# Altium PCB somiqboard.PcbDoc (part 3 of 10)
Units mm, origin at the board's own origin, x right, y up, seen from the top; angles counter-clockwise.
Board outline 110 x 96 mm, 4 copper layers (Top Layer, Ground_Plane, Power_Plane, Bottom Layer), stack 1.454 mm thick; 221 components, 356 nets, 1185 pads, 539 vias.
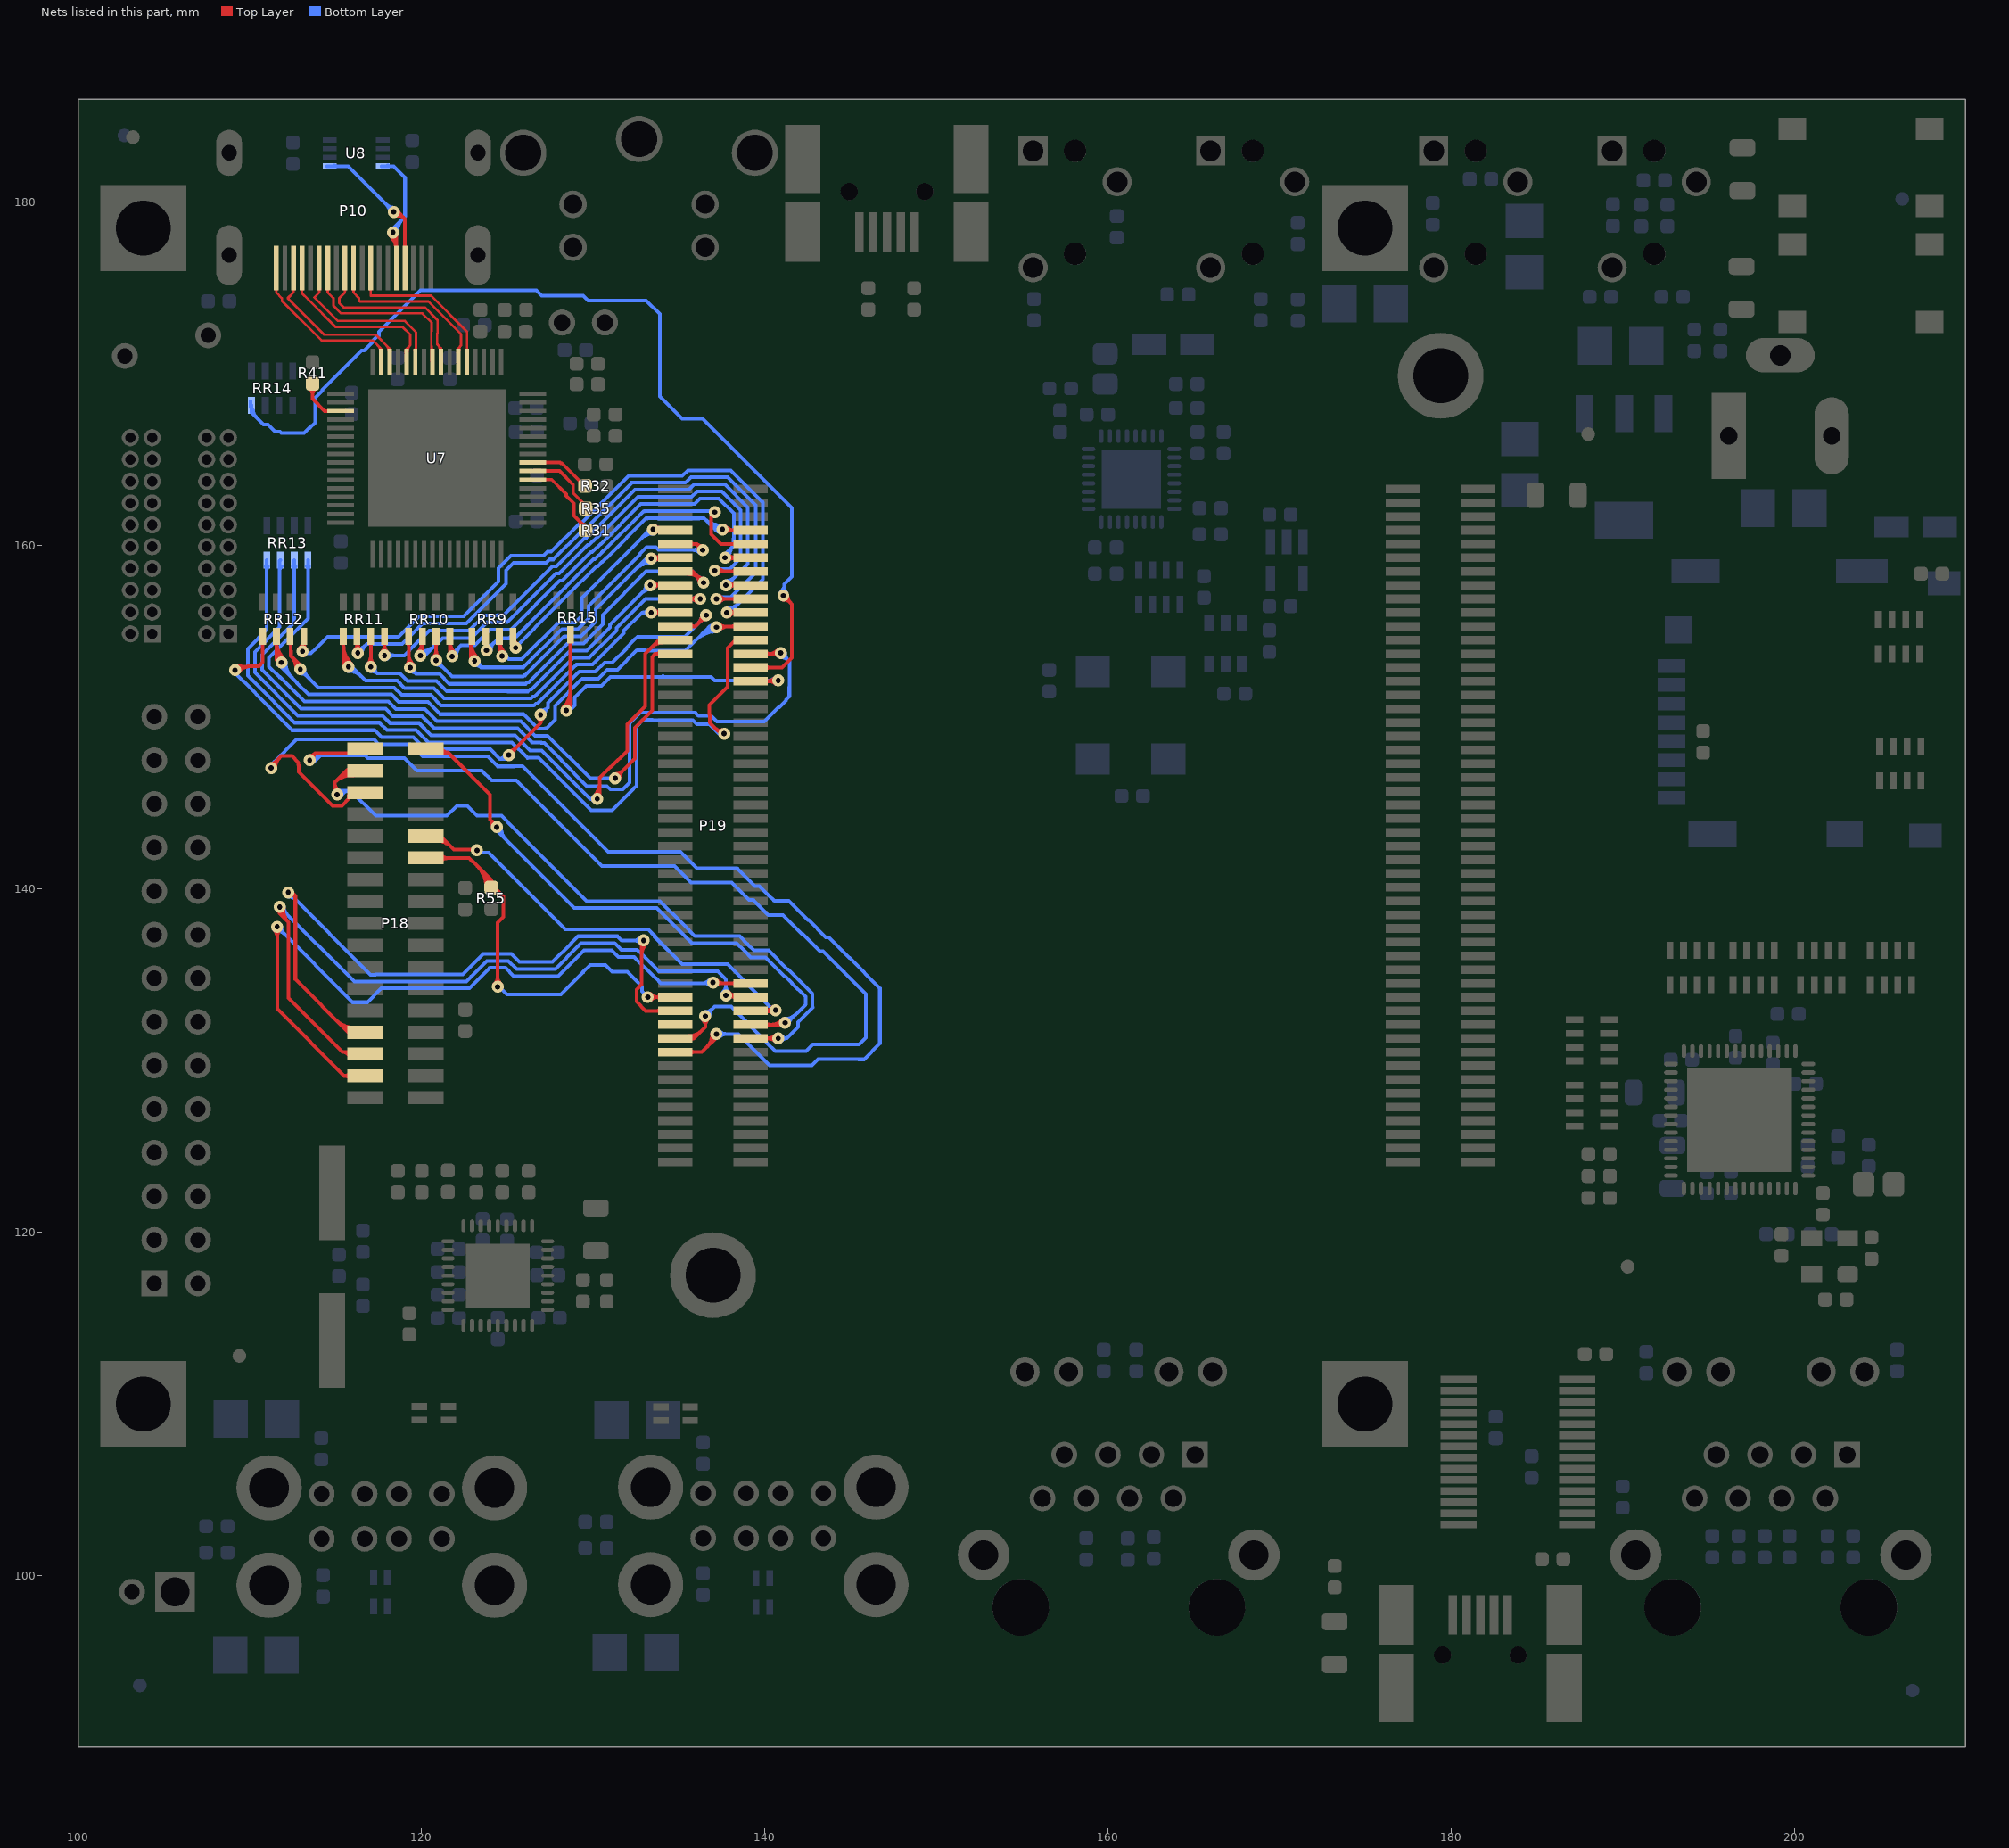
[diagram p5: the nets of this part, all layers, seen from the top]

## Via types
v1: diameter 0.7/0.7/0.7/0.7 (per signal layer), hole 0.3, Top Layer to Bottom Layer, tented both sides, 270 vias
v2: diameter 0.8, hole 0.3, Top Layer to Bottom Layer, tented both sides, 49 vias
v3: diameter 0.6/0.7/0.7/0.6 (per signal layer), hole 0.3, Top Layer to Bottom Layer, tented both sides, 47 vias
v4: diameter 0.6, hole 0.3, Top Layer to Bottom Layer, tented both sides, 43 vias
v5: diameter 1.1/1.1/1.1/1.1 (per signal layer), hole 0.6, Top Layer to Bottom Layer, tented both sides, 32 vias
v6: diameter 0.8/0.8/0.8/0.8 (per signal layer), hole 0.4, Top Layer to Bottom Layer, tented both sides, 31 vias
v7: diameter 0.9/0.9/0.9/0.9 (per signal layer), hole 0.5, Top Layer to Bottom Layer, tented both sides, 29 vias
v8: diameter 1.5/1.5/1.5/1.5 (per signal layer), hole 0.9, Top Layer to Bottom Layer, tented both sides, 14 vias
v9: diameter 1.2/1.2/1.2/1.2 (per signal layer), hole 0.6, Top Layer to Bottom Layer, tented both sides, 10 vias
v10: diameter 0.8/0.8/0.8/0.8 (per signal layer), hole 0.5, Top Layer to Bottom Layer, tented both sides, 6 vias
v11: diameter 1/1/1/1 (per signal layer), hole 0.5, Top Layer to Bottom Layer, tented both sides, 3 vias
v12: diameter 0.8/0.8/0.8/0.8 (per signal layer), hole 0.8, Top Layer to Bottom Layer, tented both sides, 2 vias
v13: diameter 1.2/1.2/1.2/1.2 (per signal layer), hole 1.2, Top Layer to Bottom Layer, tented both sides, 2 vias
v14: diameter 0.6/0.6/0.6/0.6 (per signal layer), hole 0.3, Top Layer to Bottom Layer, tented both sides, 1 vias

## Nets (pads, with @x,y where several pads share a name; then routed paths per layer and width w, separated by ;. In a path a pad name is that pad's centre, name@x,y a point inside that pad or via, vN(x,y) a via of type N, cw(c..) or ccw(c..) an arc to the next point about the centre after c; other vN are vias at no path point) (continued)
CCDC_D9: P18.5 P19.84 | length 72.2
  Top Layer w0.21: v1(111.25,147.05) 111.25,147.15 111.855,147.755 112.461,147.755 112.845,147.371 112.845,147.228 112.85,147.223 112.85,146.823 114.828,144.845 115.371,144.845 115.776,145.249 115.776,145.449 115.876,145.55 116.647,145.55 P18.5@116.716,145.619 ; v1@111.25,147.295 ccw(c111.25,147.645) 111.497,147.397 ; v1@111.495,147.05 cw(c112.328,147.05) 111.739,147.639 ; P18.5@116.716,145.6 P18.5@116.85,145.6 ; P19.84@134.8,130.5 136.35,130.5 137.3,131.45 v1@137.3,131.55 ; P19.84@135.653,130.397 cw(c135.9,130.15) 135.9,130.5 cw(c135.9,130.85) P19.84@135.653,130.603 ; 136.64,130.79 ccw(c135.88,131.55) v1@136.955,131.55 ; 136.999,131.149 ccw(c136.597,131.55) v1@137.165,131.55 ; v1(137.2,131.55) v1@137.3,131.55
  Bottom Layer w0.21: v1(111.25,147.05) 111.25,147.15 111.395,147.295 111.395,147.371 112.734,148.71 117.245,148.71 117.521,148.435 119.363,148.435 120.073,147.725 123.864,147.725 124.444,147.145 125.371,147.145 125.376,147.15 125.904,147.15 126.524,146.53 126.524,146.526 130.885,142.165 135.089,142.165 136.054,141.2 138.411,141.2 139.433,140.178 139.686,140.178 140.216,139.647 140.221,139.647 140.568,139.3 141.42,139.3 142.535,138.185 142.58,138.185 143.58,137.185 143.754,137.185 144.948,135.991 144.959,135.991 146.725,134.225 146.725,130.989 145.811,130.075 145.501,130.075 145.496,130.08 143.116,130.08 142.761,129.725 140.289,129.725 139.325,130.689 139.325,130.691 138.466,131.55 v1(137.2,131.55) ; v1@111.285,147.05 cw(c111.795,147.05) 111.434,147.411 ; v1@111.495,147.05 cw(c112.512,147.05) 111.793,147.769 ; v1@137.373,131.376 cw(c137.792,130.958) 137.792,131.55 ; v1@137.373,131.723 ccw(c137.791,132.141) 137.791,131.55
CCDC_D10: P18.3 P19.81 | length 49
  Top Layer w0.21: 114.95,145.828 ccw(c115.298,145.828) v1@115.118,145.53 ; v1(115.1,145.5) 115,145.6 114.95,145.6 114.95,146.2 ; v1@115.226,145.709 cw(c115.523,146.2) 114.95,146.2 ; 115.277,146.527 cw(c115.999,145.805) P18.3@116.067,146.824 ; 115.605,146.855 cw(c116.04,146.42) P18.3@116.081,147.034 ; P18.3@115.822,146.773 ccw(c115.639,146.687) 115.639,146.889 ; P18.3@115.822,147.005 cw(c115.639,147.091) 115.639,146.889 ; P18.3@116.053,146.615 ccw(c115.959,145.191) 114.95,146.2 ; P18.3@116.65,146.85 P18.3@116.716,146.85 ; P18.3@116.716,146.889 115.639,146.889 ; P19.81@139.2,131.3 v1(140.8,131.3) ; P19.81@140.053,131.197 cw(c140.3,130.95) 140.3,131.3 cw(c140.3,131.65) P19.81@140.053,131.403 ; v1@140.627,131.127 ccw(c140.209,130.709) 140.209,131.3 ccw(c140.209,131.891) v1@140.627,131.473 ; 114.95,146.2 115.639,146.889
  Bottom Layer w0.21: v1(115.1,145.5) 115,145.6 115.138,145.738 115.873,145.738 ; v1@115.131,145.484 cw(c115.537,145.287) 115.537,145.738 ; v1@115.32,145.393 cw(c115.873,145.123) 115.873,145.738 ; v1(140.8,131.3) 141.3,131.3 ; v1@140.994,131.15 cw(c141.3,130.912) 141.3,131.3 ; v1@140.994,131.45 ccw(c141.3,131.688) 141.3,131.3 ; 142.8,133.1 142.8,133.895 142.015,134.68 142.015,134.691 141.391,135.315 141.346,135.315 140.231,136.43 139.38,136.43 139.032,136.777 139.027,136.777 138.547,137.258 135.942,137.258 135.25,137.95 135.245,137.95 133.9,139.295 129.655,139.295 125.055,143.895 125.055,143.906 124.686,144.275 123.255,144.275 122.675,144.855 122.079,144.855 121.488,144.265 117.347,144.265 115.873,145.738 ; 142.81,133.104 141.955,132.249 141.955,131.955 141.471,131.471 141.3,131.3
CCDC_D11: P18.1 P19.82 | length 64.3
  Top Layer w0.21: v1@113.5,147.599 113.821,147.92 ; v1@113.5,147.745 ccw(c113.5,148.096) 113.748,147.848 ; v1@113.734,147.572 cw(c114.067,147.674) 113.821,147.92 ; P18.1@116.7,148.15 P18.1@116.716,148.15 ; P18.1@116.85,148.15 P18.1@116.716,148.15 ; P19.82@134.8,131.3 135.9,131.3 ; P19.82@135.547,131.235 ccw(c135.578,131.853) 136.016,131.416 ; P19.82@135.557,131.445 ccw(c135.61,132.49) 136.35,131.75 ; P19.82@135.653,131.197 cw(c135.9,130.95) 135.9,131.3 ; P19.82@135.653,131.403 ccw(c135.9,131.65) 135.9,131.3 ; v1@136.377,132.427 cw(c135.959,132.009) 136.55,132.009 cw(c137.141,132.009) v1@136.723,132.427 ; v1(136.55,132.6) 136.55,131.95 136.35,131.75 ; 113.821,147.92 116.486,147.92 P18.1@116.716,148.15 ; 135.9,131.3 136.35,131.75
  Bottom Layer w0.21: v1@113.516,147.531 ccw(c113.69,147.854) 113.949,147.595 ; v1@113.615,147.716 ccw(c113.829,148.115) 114.149,147.795 ; v1@113.729,147.413 cw(c113.854,147.366) 113.854,147.5 ; v1@113.729,147.586 ccw(c113.854,147.633) 113.854,147.5 ; v1(136.55,132.6) 137.095,133.145 138.021,133.145 138.026,133.15 138.05,133.15 140.145,131.055 140.145,131.029 140.629,130.545 142.421,130.545 142.821,130.945 145.521,130.945 145.905,131.328 145.905,131.871 145.9,131.876 145.9,133.89 144.62,135.171 144.608,135.171 143.414,136.365 143.24,136.365 142.24,137.365 142.196,137.365 141.081,138.48 140.229,138.48 139.881,138.827 139.876,138.827 139.346,139.358 139.093,139.358 138.086,140.365 135.729,140.365 134.749,141.345 130.525,141.345 125.545,146.325 124.104,146.325 123.524,146.905 119.733,146.905 119.024,147.615 116.896,147.615 116.716,147.795 114.149,147.795 ; v1@136.55,132.845 ccw(c136.55,133.436) 136.968,133.018 ccw(c137.386,132.6) v1@136.795,132.6 ; v1@113.599,147.5 v1(113.5,147.5) 113.45,147.5 113.4,147.45 113.4,147.4 113.499,147.4 v1@113.599,147.5 ; v1@113.599,147.5 113.854,147.5 ; 113.854,147.5 114.149,147.795
CCDC_FLD: P18.10 P19.77 | length 30.3
  Top Layer w0.21: P18.10@120.266,143.079 P18.10@120.35,143.079 ; P18.10@120.35,143.1 121.1,143.1 121.9,142.3 123.3,142.3 v1(123.25,142.25) ; P18.10@120.911,142.804 cw(c120.911,141.633) 121.739,142.461 ; P18.10@120.911,143.014 cw(c120.911,142.35) 121.38,142.82 ; P19.77@139.2,132.9 140.75,132.9 140.65,133 v1(140.65,132.94) ; P19.77@139.962,132.9 ccw(c139.962,133.628) v1@140.476,133.113 ; P19.77@140.053,132.797 cw(c140.3,132.55) 140.3,132.9 cw(c140.3,133.25) P19.77@140.053,133.003 ; P19.77@140.155,132.9 cw(c140.155,132.445) v1@140.476,132.767 ; v1@140.432,133.053 cw(c140.121,133.216) 140.212,132.876 cw(c140.271,132.655) v1@140.454,132.793
  Bottom Layer w0.21: v1(123.25,142.25) 123.375,142.125 123.936,142.125 128.406,137.655 132.66,137.655 132.669,137.646 132.678,137.655 133.221,137.655 133.605,137.271 133.605,137.217 135.204,135.618 137.782,135.618 ; 137.782,135.615 137.841,135.615 139.756,133.7 139.756,133.694 140.55,132.9 140.75,132.9 140.65,133 v1(140.65,132.94)
CCDC_HD: P18.29 P19.75 | length 49.9
  Top Layer w0.21: v1@111.652,138.725 cw(c111.588,138.576) 111.75,138.576 ; v1(111.75,138.95) 111.75,138.576 ; v1@111.784,138.944 ccw(c112.441,138.828) 111.97,138.357 ; v1@111.848,138.725 ccw(c111.912,138.576) 111.75,138.576 ; v1@111.991,138.907 ccw(c112.926,138.743) 112.255,138.071 ; P18.29@115.699,130.5 ccw(c115.699,130.751) P18.29@115.877,130.573 ; P18.29@115.83,130.246 ccw(c115.4,130.009) 115.4,130.5 ; P18.29@116.716,130.379 116.595,130.5 115.4,130.5 ; v1(137.75,133.8) 138.65,133.8 P19.75@138.75,133.7 ; v1@137.859,133.8 cw(c137.859,133.109) P19.75@138.347,133.597 ; v1@137.923,133.627 cw(c138.341,133.209) 138.341,133.8 cw(c138.341,134.391) v1@137.923,133.973 ; v1@137.943,133.649 cw(c138.104,133.521) 138.157,133.72 cw(c138.224,133.97) v1@137.981,133.883 ; 111.75,138.576 112.255,138.071 ; 112.255,138.071 112.255,133.645 115.4,130.5
  Bottom Layer w0.21: v1@111.75,138.705 cw(c111.75,138.114) 112.168,138.532 cw(c112.586,138.95) v1@111.995,138.95 ; v1(111.75,138.95) 116.1,134.6 117.487,134.6 117.507,134.62 122.62,134.62 122.928,134.928 122.935,134.928 123.822,135.815 125.078,135.815 125.553,135.34 127.82,135.34 129.135,136.655 129.135,136.665 129.305,136.835 131.267,136.835 131.657,136.445 132.578,136.445 132.678,136.345 132.705,136.345 133.828,135.222 133.828,135.215 133.843,135.2 136.724,135.2 136.728,135.205 137.271,135.205 137.75,134.726 v1(137.75,133.8) v1@137.85,133.9 ; v1@137.577,133.973 ccw(c137.159,134.391) 137.75,134.391 ccw(c138.341,134.391) v1@137.923,133.973
CCDC_PCLK: P18.27 P19.78 | length 46.6
  Top Layer w0.21: v1(112.25,139.8) 112.35,139.9 112.665,139.585 ; v1@112.397,139.604 cw(c112.52,139.44) 112.665,139.585 ; 115.055,132.345 ccw(c116.071,133.36) P18.27@116.071,131.924 ; 115.414,131.986 ccw(c116.071,132.643) P18.27@116.071,131.714 ; P18.27@116.716,131.649 115.751,131.649 112.665,134.735 112.665,139.585 ; v1@132.776,136.826 cw(c132.6,136.65) 132.85,136.65 ; 132.85,136.167 cw(c133.783,136.167) v1@133.123,136.826 ; v1(132.95,137) 132.85,136.9 132.85,134.45 132.545,134.145 132.545,133.429 133.074,132.9 P19.78@134.8,132.9 ; P19.78@133.947,132.797 ccw(c133.7,132.55) 133.7,132.9 ccw(c133.7,133.25) P19.78@133.947,133.003
  Bottom Layer w0.21: v1@112.25,139.555 cw(c112.25,138.964) 112.668,139.382 cw(c113.086,139.8) v1@112.495,139.8 ; v1(112.25,139.8) 117.04,135.01 117.317,135.01 117.337,135.03 122.43,135.03 123.625,136.225 125.247,136.225 125.722,135.75 127.65,135.75 128.725,136.825 128.725,136.835 129.135,137.245 131.437,137.245 131.682,137 v1(132.95,137) ; v1@132.776,136.826 ccw(c132.358,136.408) 132.358,137 ccw(c132.358,137.591) v1@132.776,137.173
CCDC_VD: P18.31 P19.73 | length 48.6
  Top Layer w0.21: v1@111.427,137.627 cw(c111.009,137.209) 111.6,137.209 cw(c112.191,137.209) v1@111.773,137.627 ; v1(111.6,137.8) 111.6,133.018 115.509,129.109 ; P18.31@115.854,128.94 ccw(c115.509,128.672) 115.509,129.109 ; P18.31@115.854,129.278 cw(c115.509,129.546) 115.509,129.109 ; P18.31@116.716,129.109 115.509,129.109 ; v1(137,134.55) 136.95,134.5 P19.73@139.25,134.5 ; v1@137.173,134.376 cw(c137.471,134.078) 137.471,134.5 ; v1@137.173,134.723 ccw(c137.711,135.261) 137.711,134.5 ; P19.73@138.347,134.397 ccw(c138.1,134.15) 138.1,134.5 ccw(c138.1,134.85) P19.73@138.347,134.603
  Bottom Layer w0.21: v1@111.6,137.555 cw(c111.6,136.964) 112.018,137.382 cw(c112.436,137.8) v1@111.845,137.8 ; v1(111.6,137.8) 116,133.4 116.867,133.4 117.677,134.21 122.802,134.21 123.345,134.753 123.345,134.758 123.992,135.405 124.908,135.405 125.383,134.93 127.99,134.93 129.484,136.425 131.097,136.425 131.487,136.035 132.409,136.035 133.638,134.805 133.658,134.805 133.963,134.5 136.95,134.5 v1(137,134.55) ; 136.288,134.5 ccw(c136.288,135.261) v1@136.826,134.723 ; 136.528,134.5 cw(c136.528,134.078) v1@136.826,134.376
CCDC_WEN: P18.12 P19.76 R55.1 | length 31.5
  Top Layer w0.21: P18.12@120.25,141.8 122.773,141.8 122.978,141.595 123.014,141.595 124.079,140.53 ; P18.12@121.105,141.615 cw(c121.553,141.167) 121.553,141.8 ; P18.12@121.105,142.003 ccw(c121.597,142.495) 121.597,141.8 ; 123.258,141.351 cw(c121.987,140.081) R55.1@123.784,140.081 ; 123.616,140.993 cw(c122.704,140.081) R55.1@123.994,140.081 ; R55.1@123.962,140.352 ccw(c123.885,140.53) 124.079,140.53 ; 123.975,140.634 cw(c123.421,140.081) R55.1@124.204,140.081 ; R55.1@124.079,140.081 124.079,140.53 ; R55.1@124.091,139.997 cw(c124.154,139.532) 124.486,139.864 ; R55.1@124.119,139.789 cw(c124.226,139.006) 124.785,139.565 ; R55.1@124.196,140.352 cw(c124.273,140.53) 124.079,140.53 ; R55.1@124.25,140.1 124.786,139.564 ; v1@124.277,134.473 ccw(c123.859,134.891) 124.45,134.891 ccw(c125.041,134.891) v1@124.623,134.473 ; R55.1@124.374,140.081 ccw(c124.627,140.081) R55.1@124.448,139.902 ; v1(124.45,134.3) 124.45,138.05 124.786,138.386 124.786,139.564 ; v1(133.2,133.7) P19.76@134.8,133.7 ; v1@133.373,133.527 cw(c133.791,133.109) 133.791,133.7 cw(c133.791,134.291) v1@133.373,133.873 ; P19.76@133.947,133.597 ccw(c133.7,133.35) 133.7,133.7 ccw(c133.7,134.05) P19.76@133.947,133.803
  Bottom Layer w0.21: v1(124.45,134.3) 124.6,134.3 124.6,134.238 124.994,133.845 128.145,133.845 129.235,134.935 129.235,134.941 129.421,135.127 129.421,135.145 129.841,135.565 130.741,135.565 131.131,135.175 132.011,135.175 132.875,134.311 132.875,134.025 v1(133.2,133.7)
CCDC_XCLKA: P18.2 P19.79 | length 38.8
  Top Layer w0.21: P18.2@120.266,148.159 120.475,147.95 121.55,147.95 ; P18.2@120.974,148.177 ccw(c121.273,148.261) P18.2@121.273,147.95 ; P18.2@121.176,148.233 ccw(c121.55,148.339) 121.55,147.95 ; 124.068,143.982 ccw(c124.4,144.314) v1@124.4,143.845 ; v1@124.156,143.621 ccw(c123.619,143.669) 124,144.05 ; v1@124.3,143.55 v1@124.4,143.65 ; v1(124.4,143.6) v1@124.4,143.65 ; P19.79@139.2,132.1 v1@141.2,132.1 ; P19.79@140.053,131.997 cw(c140.3,131.75) 140.3,132.1 cw(c140.3,132.45) P19.79@140.053,132.203 ; 140.367,132.1 ccw(c140.367,133.032) v1@141.026,132.373 ; 140.849,132.1 cw(c140.849,131.849) v1@141.026,132.026 ; 121.55,147.95 124,145.5 124,144.05 ; 124,144.05 v1@124.4,143.65
  Bottom Layer w0.21: v1@124.435,143.6 ccw(c125.001,143.6) 124.601,143.199 ; v1@124.485,143.405 124.53,143.45 124.6,143.45 124.6,143.2 ; v1@124.589,143.444 ccw(c124.728,143.328) 124.6,143.2 ; v1@124.645,143.6 ccw(c125.718,143.6) 124.959,142.841 ; v1@141.2,132.445 ccw(c141.2,133.326) 141.823,132.703 ; 141.21,134.905 141.177,134.905 140.062,136.02 139.21,136.02 138.862,136.367 138.858,136.367 138.377,136.848 135.768,136.848 133.731,138.885 128.915,138.885 124.6,143.2 ; 141.221,134.905 141.605,134.521 ; v1@141.3,132.174 141.3,132.18 142.39,133.27 142.39,133.725 141.605,134.51 ; v1@141.445,132.2 cw(c141.746,132.2) 141.533,132.413
  other v1: 141.2,132.2
CCDC_XCLKB: P19.80
CLK_N: P10.12 U7.21 | length 10.2
  Top Layer w0.144: P10.12@117.005,174.959 cw(c116.888,174.843) 117.053,174.843 cw(c117.217,174.843) P10.12@117.101,174.959 ; P10.12@117.053,176.167 117.053,174.753 117.05,174.75 117.05,174.57 120.566,174.57 122.666,172.47 122.666,170.712 U7.21@122.654,170.7 ; U7.21@122.617,171.387 ccw(c122.498,171.506) 122.666,171.506
CLK_P: P10.10 U7.22 | length 11.3
  Top Layer w0.144: P10.10@116.005,174.959 cw(c115.888,174.843) 116.053,174.843 cw(c116.217,174.843) P10.10@116.101,174.959 ; P10.10@116.053,176.167 116.053,174.75 116.381,174.422 116.381,174.258 116.412,174.226 120.424,174.226 122.322,172.328 122.322,171.672 ; U7.22@122.117,171.387 ccw(c122.026,171.478) 122.154,171.478 ccw(c122.282,171.478) U7.22@122.191,171.387 ; U7.22@122.154,170.7 122.154,171.504 122.322,171.672 ; U7.22@122.207,171.355 cw(c122.603,171.39) 122.322,171.672
DAT0_N: P10.9 U7.24 | length 11.7
  Top Layer w0.144: P10.9@115.505,174.959 cw(c115.388,174.843) 115.553,174.843 cw(c115.717,174.843) P10.9@115.601,174.959 ; P10.9@115.553,176.167 115.553,174.75 115.55,174.75 115.225,174.425 115.225,174.125 115.468,173.882 120.204,173.882 120.95,173.136 120.95,172.386 120.944,172.38 120.944,172.344 120.928,172.328 120.928,171.771 120.944,171.755 120.944,171.72 121.154,171.51 U7.24@121.154,170.7 ; 120.951,171.713 cw(c120.587,171.35) U7.24@121.101,171.35 ; U7.24@121.117,171.387 ccw(c121.026,171.478) 121.154,171.478 ccw(c121.282,171.478) U7.24@121.191,171.387
DAT0_P: P10.7 U7.25 | length 11.3
  Top Layer w0.144: P10.7@114.505,174.959 cw(c114.388,174.843) 114.553,174.843 cw(c114.717,174.843) P10.7@114.601,174.959 ; P10.7@114.553,176.167 114.553,174.75 114.881,174.422 114.881,173.983 115.326,173.538 120.062,173.538 120.6,173 120.6,172.487 120.584,172.47 120.584,171.629 120.6,171.613 120.6,170.754 U7.25@120.654,170.7 ; 120.6,171.608 ccw(c120.912,171.608) U7.25@120.691,171.387
DAT1_N: P10.6 U7.27 | length 10.8
  Top Layer w0.144: P10.6@114.005,174.959 cw(c113.888,174.843) 114.053,174.843 cw(c114.217,174.843) P10.6@114.101,174.959 ; P10.6@114.053,176.167 114.053,174.75 113.77,174.467 115.142,173.094 119.042,173.094 119.694,172.442 119.694,170.74 U7.27@119.654,170.7 ; U7.27@119.617,171.387 ccw(c119.429,171.575) 119.694,171.575
DAT1_P: P10.4 U7.28 | length 11.1
  Top Layer w0.144: P10.4@113.005,174.959 cw(c112.888,174.843) 113.053,174.843 cw(c113.217,174.843) P10.4@113.101,174.959 ; P10.4@113.053,176.167 113.053,174.697 113.426,174.324 115,172.75 118.9,172.75 119.35,172.3 119.35,171.681 119.1,171.431 119.1,170.754 U7.28@119.154,170.7 ; U7.28@119.207,171.35 cw(c119.66,171.35) 119.34,171.67
DAT2_N: P10.3 U7.30 | length 10.6
  Top Layer w0.144: P10.3@112.505,174.959 cw(c112.388,174.843) 112.553,174.843 cw(c112.717,174.843) P10.3@112.601,174.959 ; P10.3@112.553,176.167 112.553,174.75 112.55,174.75 112.225,174.425 112.225,174.412 114.342,172.294 117.345,172.294 118.154,171.485 U7.30@118.154,170.7 ; 117.968,171.67 cw(c117.648,171.35) U7.30@118.101,171.35 ; U7.30@118.117,171.387 ccw(c118.026,171.478) 118.154,171.478 ccw(c118.282,171.478) U7.30@118.191,171.387
DAT2_P: P10.1 U7.31 | length 10.6
  Top Layer w0.144: P10.1@111.505,174.959 cw(c111.388,174.843) 111.553,174.843 cw(c111.717,174.843) P10.1@111.601,174.959 ; P10.1@111.553,176.167 111.553,174.75 111.881,174.422 111.881,174.269 114.2,171.95 117.189,171.95 117.654,171.485 U7.31@117.654,170.7 ; 117.468,171.67 cw(c117.148,171.35) U7.31@117.601,171.35 ; U7.31@117.617,171.387 ccw(c117.526,171.478) 117.654,171.478 ccw(c117.782,171.478) U7.31@117.691,171.387
DDC_I2C3_SCL: P10.15 U8.8 | length 10.4
  Top Layer w0.21: v1@118.177,178.077 cw(c117.269,177.169) P10.15@118.553,177.169 ; v1@118.325,178.225 cw(c117.776,177.676) 118.553,177.676 ; P10.15@118.553,176.167 v1@118.553,178.247
  Bottom Layer w0.21: U8.8@117.7,182.1 118.4,182.1 119.055,181.445 119.055,179.179 118.35,178.474 v1(118.35,178.25) ; U8.8@118.037,182.162 ccw(c118.186,182.311) 118.186,182.1 ; v1@118.385,178.25 cw(c119.01,178.25) 118.568,178.692 ; v1@118.595,178.25 cw(c119.727,178.25) 118.926,179.05
DDC_I2C3_SDA: P10.16 U8.1 | length 10.6
  Top Layer w0.21: v1@118.35,179.45 v1(118.4,179.45) ; v1@118.408,179.416 cw(c118.505,179.026) 118.79,179.31 ; v1@118.459,179.212 cw(c118.61,178.605) 119.053,179.047 ; v1@118.65,179.45 119.053,179.047 ; P10.16@119.053,176.167 119.053,179.047
  Bottom Layer w0.21: U8.1@114.505,182.1 115.75,182.1 v1(118.4,179.45) ; U8.1@114.937,182.162 ccw(c115.086,182.311) 115.086,182.1 ; v1@118.155,179.45 ccw(c117.564,179.45) 117.982,179.868 ccw(c118.4,180.286) v1@118.4,179.695
DK1: R32.2 U7.8 | length 3.6
  Top Layer w0.2: U7.8@126.504,164.85 128.083,164.85 128.133,164.8 128.2,164.8 129.5,163.5 R32.2@129.55,163.5
DK2: R35.2 U7.7 | length 4.3
  Top Layer w0.2: U7.7@126.504,164.35 128.05,164.35 128.852,163.548 128.852,163.07 129.55,162.372 R35.2@129.55,162.25
DK3: R31.2 U7.6 | length 5.6
  Top Layer w0.2: U7.6@126.504,163.85 127.6,163.85 128.452,162.998 128.452,162.904 128.885,162.471 128.885,161.764 129.178,161.471 ; R31.2@129.298,160.99 ccw(c128.839,161.131) 129.179,161.471 129.55,161.1 R31.2@129.55,160.95 ; R31.2@129.353,161.297 ccw(c129.585,161.529) R31.2@129.585,161.201
DKEN: R41.2 U7.35 | length 3.9
  Top Layer w0.21: R41.2@113.456,169.229 cw(c112.953,168.726) 113.665,168.726 cw(c114.377,168.726) R41.2@113.874,169.229 ; R41.2@113.665,169.438 113.665,168.558 114.373,167.85 U7.35@115.304,167.85
DSS_ACBIAS: P19.29 RR15.2 | length 24.2
  Top Layer w0.21: v1@128.277,150.573 ccw(c127.281,151.569) 128.689,151.569 ; v1@128.425,150.424 ccw(c127.788,151.062) 128.689,151.062 ; RR15.2@128.622,154.446 cw(c128.46,154.284) 128.689,154.284 cw(c128.918,154.284) RR15.2@128.756,154.446 ; v1@128.689,150.539 RR15.2@128.689,154.813 ; P19.29@139.2,152.1 v1@140.55,152.1 ; P19.29@140.053,151.997 cw(c140.3,151.75) 140.3,152.1 cw(c140.3,152.45) P19.29@140.053,152.203 ; P19.29@140.088,152.1 ccw(c140.088,152.862) v1@140.627,152.323 ; 140.329,152.1 cw(c140.329,151.679) v1@140.627,151.977
  Bottom Layer w0.21: v1(128.45,150.4) 128.55,150.3 128.945,150.695 ; v1@128.551,150.623 ccw(c128.696,150.944) 128.945,150.695 ; 134.085,152.415 134.036,152.365 131.01,152.365 130.489,151.844 129.618,151.844 128.945,151.171 128.945,150.695 ; 134.135,152.365 136.891,152.365 137.106,152.15 v1(140.8,152.15) ; v1@140.627,151.977 ccw(c140.209,151.559) 140.209,152.15 ccw(c140.209,152.741) v1@140.627,152.323
DSS_DATA0: P19.7 RR9.8 | length 23.4
  Top Layer w0.21: RR9.8@125.285,154.348 cw(c125.149,154.201) v1@125.349,154.201 ; RR9.8@125.35,154.75 RR9.8@125.349,154.718 RR9.8@125.349,154.718 ; RR9.8@125.413,154.348 ccw(c125.549,154.201) v1@125.349,154.201 ; RR9.8@125.436,154.381 ccw(c125.712,154.262) v1(125.5,154.05) v1@125.349,154.201 ; v1@125.618,154.265 cw(c125.865,154.718) RR9.8@125.349,154.718 ; v1@137.7,160.9 P19.7@139.2,160.9 ; v1@137.723,160.777 cw(c138.021,160.479) 138.021,160.9 ; v1@137.723,161.123 ccw(c138.262,161.662) P19.7@138.262,160.9 ; P19.7@138.347,160.797 ccw(c138.1,160.55) 138.1,160.9 ccw(c138.1,161.25) P19.7@138.347,161.003 ; v1@125.349,154.201 RR9.8@125.349,154.718
  Bottom Layer w0.21: v1(125.5,154.05) 125.5,154.1 127.732,156.332 128.55,157.15 128.552,157.15 130.209,158.807 130.286,158.807 130.526,159.047 130.547,159.047 130.787,159.288 130.807,159.288 133.109,161.59 133.17,161.59 133.18,161.6 133.224,161.6 133.228,161.605 133.771,161.605 133.786,161.59 136.203,161.59 136.217,161.605 136.465,161.605 ; 136.798,161.272 ccw(c137.495,161.968) v1@137.548,160.985 ; 137.131,160.939 ccw(c137.529,161.337) v1@137.559,160.775 ; v1@137.313,161.011 cw(c137.17,161.047) 137.17,160.9 ; v1@137.351,160.807 ccw(c137.17,160.678) 137.17,160.9 ; v1@137.537,161.195 cw(c137.46,162.599) 136.466,161.605 ; v1@137.55,160.9 137.17,160.9 ; 136.465,161.605 137.17,160.9
  other v1: 137.55,160.95
DSS_DATA1: P19.8 RR9.7 | length 20.1
  Top Layer w0.21: RR9.7@124.482,154.351 cw(c124.32,154.189) 124.549,154.189 cw(c124.778,154.189) RR9.7@124.616,154.351 ; 124.549,154.039 ccw(c125.18,154.039) v1@124.734,153.593 ; RR9.7@124.549,154.546 ccw(c125.687,154.546) v1@124.882,153.741 ; RR9.7@124.549,154.718 124.549,153.951 v1@124.75,153.75 ; v1(133.5,160.95) 133.457,160.907 133.45,160.9 P19.8@134.8,160.9 ; v1@133.673,160.776 cw(c133.971,160.478) P19.8@133.971,160.9 ; v1@133.673,161.123 ccw(c134.211,161.661) P19.8@134.211,160.9 ; v1@133.691,160.797 cw(c133.824,160.69) 133.869,160.855 cw(c133.914,161.025) v1@133.741,160.994 ; P19.8@133.947,160.797 ccw(c133.7,160.55) 133.7,160.9 ccw(c133.7,161.25) P19.8@133.947,161.003
  Bottom Layer w0.21: v1(124.709,153.568) 124.932,153.568 125.105,153.395 125.856,153.395 127.995,155.534 128.96,155.534 129.344,155.918 129.344,156.944 132.715,160.315 133.3,160.95 v1@133.4,160.85 ; 132.75,160.353 cw(c133.555,159.612) v1@133.51,160.705 ; 133.094,160.726 cw(c133.525,160.328) v1@133.501,160.915 ; v1@133.35,160.9 v1@133.4,160.85 ; v1@133.45,160.8 v1@133.4,160.85
DSS_DATA2: P19.9 RR9.6 | length 22.1
  Top Layer w0.21: v1(137.1,161.95) 136.895,161.745 136.895,160.679 137.474,160.1 P19.9@139.2,160.1 ; P19.9@138.347,159.997 ccw(c138.1,159.75) 138.1,160.1 ccw(c138.1,160.45) P19.9@138.347,160.203
  Bottom Layer w0.21: v1@123.8,153.9 124.5,154.6 125.124,154.6 125.229,154.705 125.525,154.705 127.322,156.502 128.38,157.56 128.382,157.56 130.039,159.217 130.116,159.217 130.357,159.457 130.377,159.457 130.617,159.698 130.637,159.698 132.939,162 133,162 ; v1@123.8,154.145 ccw(c123.8,154.736) 124.218,154.318 ccw(c124.636,153.9) v1@124.045,153.9 ; 133,162.02 137.03,162.02 v1(137.1,161.95)
  other v1: 123.8,153.9
DSS_DATA3: P19.10 RR9.5 | length 24.9
  Top Layer w0.21: v1@122.9,153.285 RR9.5@122.9,154.45 ; 122.9,153.876 ccw(c123.701,153.876) v1@123.135,153.31 ; 122.9,154.07 cw(c123.297,154.07) RR9.5@123.016,154.351 ; RR9.5@122.9,154.383 ccw(c124.208,154.383) v1@123.283,153.458 ; P19.10@134.8,160.1 136.05,160.1 ; P19.10@135.653,159.997 cw(c135.9,159.75) 135.9,160.1 cw(c135.9,160.45) P19.10@135.653,160.203 ; v1@136.157,159.783 ccw(c135.783,159.833) 136.05,160.1 ; v1@136.367,159.993 cw(c136.317,160.367) 136.05,160.1 ; v1(136.4,159.75) 136.05,160.1
  Bottom Layer w0.21: v1@123.055,153.23 123,153.285 v1(123.11,153.285) ; v1@123.1,153.3 123.487,152.913 ; v1@123.132,153.041 cw(c123.174,152.6) 123.487,152.913 ; v1@123.354,153.268 ccw(c123.81,153.236) 123.487,152.913 ; v1@136.227,159.577 ccw(c135.809,159.159) 135.809,159.75 ccw(c135.809,160.341) v1@136.227,159.923 ; v1@136.35,159.75 133.826,159.75 133.671,159.905 133.128,159.905 132.745,159.521 132.745,159.465 129.754,156.474 129.754,155.748 129.13,155.124 128.204,155.124 128.17,155.09 128.13,155.09 125.954,152.913 123.487,152.913 ; v1@136.375,159.775 v1(136.4,159.75)
DSS_DATA4: P19.11 RR10.8 | length 31.6
  Top Layer w0.21: RR10.8@121.599,154.351 cw(c121.437,154.189) 121.666,154.189 cw(c121.895,154.189) RR10.8@121.733,154.351 ; 121.666,153.957 ccw(c122.207,153.957) v1@121.825,153.574 ; RR10.8@121.666,154.464 ccw(c122.714,154.464) v1@121.973,153.723 ; RR10.8@121.666,154.718 121.666,153.566 121.783,153.566 v1(121.8,153.55) ; v1(137.7,159.3) P19.11@139.2,159.3 ; v1@137.873,159.127 cw(c138.291,158.709) 138.291,159.3 cw(c138.291,159.891) v1@137.873,159.473 ; P19.11@138.347,159.197 ccw(c138.1,158.95) 138.1,159.3 ccw(c138.1,159.65) P19.11@138.347,159.403
  Bottom Layer w0.21: v1(121.8,153.55) 121.7,153.55 121.684,153.566 122.318,154.2 122.6,154.2 ; v1@121.8,153.795 ccw(c121.8,154.067) 121.993,153.875 ; v1@122.045,153.55 cw(c122.955,153.55) 122.311,154.193 ; 122.6,154.21 123.11,154.21 123.62,154.72 123.62,154.724 124.011,155.115 125.215,155.115 128.07,157.97 128.212,157.97 129.869,159.627 129.947,159.627 130.187,159.867 130.207,159.867 130.447,160.108 130.467,160.108 132.79,162.43 135.919,162.43 136.244,162.755 137.345,162.755 138.205,161.895 138.205,160.417 138.2,160.412 138.2,160 ; v1(137.7,159.3) 137.7,159.5 138.2,160 ; v1@137.735,159.302 cw(c138.212,159.336) 137.874,159.674 ; v1@137.944,159.317 cw(c138.822,159.378) 138.2,160
DSS_DATA5: P19.12 RR10.7 | length 24.9
  Top Layer w0.21: v1@120.693,153.489 ccw(c120.275,153.907) 120.866,153.907 ccw(c121.457,153.907) v1@121.039,153.489 ; RR10.7@120.799,154.351 cw(c120.637,154.189) 120.866,154.189 cw(c121.095,154.189) RR10.7@120.933,154.351 ; v1(120.866,153.316) RR10.7@120.866,154.718 ; v1(133.4,159.25) 133.35,159.3 P19.12@134.8,159.3 ; v1@133.573,159.076 cw(c134.113,158.537) P19.12@134.113,159.3 ; v1@133.573,159.423 ccw(c133.87,159.72) P19.12@133.87,159.3 ; v1@133.586,159.409 ccw(c133.765,159.561) 133.826,159.334 ccw(c133.904,159.045) v1@133.627,159.158 ; P19.12@133.947,159.197 ccw(c133.7,158.95) 133.7,159.3 ccw(c133.7,159.65) P19.12@133.947,159.403
  Bottom Layer w0.21: v1@120.85,153.3 121.205,152.945 ; v1(120.866,153.316) v1@120.9,153.316 ; v1@120.878,153.071 cw(c120.899,152.638) 121.205,152.945 ; v1@121.106,153.269 ccw(c121.46,153.2) 121.205,152.945 ; 132.486,158.626 cw(c133.4,157.712) v1@133.4,159.005 ; 132.844,158.985 cw(c133.4,158.429) v1@133.4,159.215 ; v1@133.3,159.35 v1(133.4,159.25) ; v1@133.35,159.25 133.11,159.25 130.164,156.304 130.164,155.578 129.3,154.714 128.374,154.714 128.34,154.68 128.3,154.68 126.065,152.445 125.999,152.445 125.934,152.38 121.796,152.38 121.231,152.945 121.205,152.945
DSS_DATA6: P19.13 RR10.6 | length 36.2
  Top Layer w0.21: v1@119.777,153.773 ccw(c119.078,154.472) RR10.6@120.066,154.472 ; v1@119.925,153.624 ccw(c119.585,153.965) 120.066,153.965 ; RR10.6@119.999,154.351 cw(c119.837,154.189) 120.066,154.189 cw(c120.295,154.189) RR10.6@120.133,154.351 ; v1@120.066,153.6 RR10.6@120.066,154.718 ; v1@137.1,158.5 P19.13@139.2,158.5 ; v1@137.273,158.376 cw(c137.571,158.078) 137.571,158.5 ; v1@137.273,158.723 ccw(c137.811,159.261) 137.811,158.5 ; P19.13@138.347,158.397 ccw(c138.1,158.15) 138.1,158.5 ccw(c138.1,158.85) P19.13@138.347,158.603
  Bottom Layer w0.21: v1(119.95,153.6) v1@120.1,153.6 ; v1@119.95,153.635 ccw(c119.95,154.38) 120.477,153.853 ; v1@119.95,153.845 ccw(c119.95,155.097) 120.835,154.211 ; v1@120.066,153.566 v1@120.1,153.6 ; 122.95,154.65 122.92,154.62 ; 124.649,155.551 124.636,155.539 123.855,155.539 123.21,154.894 123.21,154.89 122.94,154.62 122.92,154.62 ; 124.65,155.55 125.03,155.55 127.86,158.38 128.042,158.38 129.699,160.037 129.777,160.037 130.017,160.277 130.037,160.277 130.277,160.518 130.297,160.518 132.62,162.84 135.75,162.84 136.074,163.165 137.515,163.165 138.615,162.065 138.615,159.289 137.971,158.645 137.445,158.645 v1@137.4,158.6 ; v1@137.273,158.376 cw(c137.921,157.728) 137.921,158.645 ; v1@137.273,158.723 ccw(c137.461,158.911) 137.461,158.645 ; v1@120.1,153.6 120.223,153.6 121.244,154.62 122.92,154.62
  other v1: 137.1,158.55
DSS_DATA7: P19.14 RR10.5 | length 29.7
  Top Layer w0.21: v1@119.177,153.073 ccw(c118.96,153.289) 119.266,153.289 ; RR10.5@119.199,154.351 cw(c119.037,154.189) 119.266,154.189 cw(c119.495,154.189) RR10.5@119.333,154.351 ; 119.266,153.693 ccw(c120.143,153.693) v1@119.523,153.073 ; RR10.5@119.266,154.718 119.266,152.834 119.332,152.9 v1(119.35,152.9) ; P19.14@134.8,158.5 135.8,158.5 v1(136.45,157.85) ; P19.14@135.55,158.355 cw(c135.55,157.401) v1@136.224,158.076 ; P19.14@135.55,158.565 cw(c135.55,158.118) 135.866,158.434 ; v1@136.205,157.85 ccw(c135.614,157.85) 136.032,158.268 ccw(c136.45,158.686) v1@136.45,158.095
  Bottom Layer w0.21: v1(119.35,152.9) 119.332,152.9 119.697,152.535 ; v1@119.369,152.655 cw(c119.402,152.24) 119.697,152.535 ; v1@119.592,152.86 ccw(c119.962,152.8) 119.697,152.535 ; v1@136.205,157.85 ccw(c135.614,157.85) 136.032,158.268 ccw(c136.45,158.686) v1@136.45,158.095 ; v1(136.45,157.85) 135.8,158.5 133.1,158.5 130.574,155.974 130.574,155.408 129.47,154.304 128.543,154.304 128.509,154.27 128.495,154.27 126.26,152.035 126.169,152.035 126.084,151.95 121.646,151.95 121.062,152.535 119.697,152.535
DSS_DATA8: P19.15 RR11.8 | length 39.1
  Top Layer w0.21: v1@117.683,153.779 ccw(c117.265,154.197) 117.856,154.197 ccw(c118.447,154.197) v1@118.029,153.779 ; RR11.8@117.789,154.351 cw(c117.627,154.189) 117.856,154.189 cw(c118.085,154.189) RR11.8@117.923,154.351 ; v1(117.856,153.606) RR11.8@117.856,154.718 ; v1(137.75,157.7) P19.15@139.2,157.7 ; v1@137.923,157.527 cw(c138.341,157.109) 138.341,157.7 cw(c138.341,158.291) v1@137.923,157.873 ; v1@137.965,157.582 cw(c138.19,157.458) 138.123,157.706 cw(c138.093,157.821) v1@137.981,157.781 ; v1@137.965,157.818 ccw(c138.19,157.942) 138.123,157.694 ccw(c138.093,157.579) v1@137.981,157.619 ; P19.15@138.347,157.597 ccw(c138.1,157.35) 138.1,157.7 ccw(c138.1,158.05) P19.15@138.347,157.803
  Bottom Layer w0.21: v1(117.856,153.606) 119.006,153.606 119.678,154.278 120.46,155.06 122.78,155.06 ; v1@118.029,153.433 cw(c118.447,153.015) 118.447,153.606 cw(c118.447,154.197) v1@118.029,153.779 ; 122.77,155.05 122.78,155.06 ; 122.8,155.06 122.796,155.06 ; 135.563,163.27 135.57,163.27 ; 135.6,163.3 135.57,163.27 ; v1@137.7,157.6 139.025,158.925 139.025,162.235 137.685,163.575 135.905,163.575 135.6,163.27 135.57,163.27 ; v1@137.75,157.945 ccw(c137.75,158.657) 138.254,158.154 ; v1@137.995,157.7 cw(c138.466,157.7) 138.133,158.033 ; 122.78,155.06 122.796,155.06 ; 122.796,155.06 123.685,155.949 124.449,155.949 124.461,155.961 124.821,155.961 127.65,158.79 127.872,158.79 129.53,160.447 129.607,160.447 129.847,160.687 129.867,160.687 132.44,163.26 135.56,163.26 135.57,163.27
DSS_DATA9: P19.16 RR11.7 | length 28.1
  Top Layer w0.21: v1@116.877,153.111 ccw(c116.444,153.544) 117.056,153.544 ; RR11.7@116.989,154.351 cw(c116.827,154.189) 117.056,154.189 cw(c117.285,154.189) RR11.7@117.123,154.351 ; v1(117.05,152.938) 117.056,152.944 RR11.7@117.056,154.718 ; 117.056,153.515 ccw(c117.627,153.515) v1@117.223,153.111 ; v1(133.35,157.7) P19.16@134.8,157.7 ; v1@133.523,157.527 cw(c133.941,157.109) 133.941,157.7 cw(c133.941,158.291) v1@133.523,157.873 ; v1@133.565,157.582 cw(c133.79,157.458) 133.723,157.706 cw(c133.693,157.821) v1@133.581,157.781 ; v1@133.565,157.818 ccw(c133.79,157.942) 133.723,157.694 ccw(c133.693,157.579) v1@133.581,157.619 ; P19.16@133.947,157.597 ccw(c133.7,157.35) 133.7,157.7 ccw(c133.7,158.05) P19.16@133.947,157.803
  Bottom Layer w0.21: v1(117.05,152.938) 117.428,152.56 ; v1@117.068,152.694 cw(c117.102,152.234) 117.428,152.56 ; v1@117.294,152.92 ccw(c117.754,152.886) 117.428,152.56 ; 132.846,157.246 cw(c133.35,156.743) v1@133.35,157.455 ; 132.967,157.367 ccw(c132.634,157.7) v1@133.105,157.7 ; v1@133.35,157.75 130.984,155.384 130.984,155.238 129.64,153.894 128.713,153.894 128.679,153.86 128.664,153.86 126.429,151.625 126.339,151.625 126.224,151.51 125.05,151.51 125.04,151.52 121.497,151.52 120.892,152.125 119.198,152.125 118.763,152.56 117.428,152.56
DSS_DATA10: P19.17 RR11.6 | length 43.6
  Top Layer w0.21: v1@116.127,153.923 ccw(c115.814,154.236) RR11.6@116.256,154.236 ; RR11.6@116.189,154.351 cw(c116.027,154.189) 116.256,154.189 cw(c116.485,154.189) RR11.6@116.323,154.351 ; RR11.6@116.256,154.447 ccw(c116.997,154.447) v1@116.473,153.923 ; RR11.6@116.256,154.718 116.256,153.706 v1(116.3,153.75) ; v1(137.2,156.9) 137.1,156.9 P19.17@139.2,156.9 ; v1@137.373,156.726 cw(c137.792,156.307) 137.792,156.9 ; v1@137.373,157.073 ccw(c137.79,157.49) 137.79,156.9 ; P19.17@138.347,156.797 ccw(c138.1,156.55) 138.1,156.9 ccw(c138.1,157.25) P19.17@138.347,157.003
  Bottom Layer w0.21: v1(116.3,153.75) 116.83,154.28 118.88,154.28 120.075,155.475 122.631,155.475 124.945,157.789 124.945,158.562 125.387,159.005 126.75,159.005 ; v1@116.3,153.995 ccw(c116.3,154.586) 116.718,154.168 ccw(c117.136,153.75) v1@116.545,153.75 ; 126.75,159 127.28,159 127.48,159.2 127.703,159.2 129.36,160.857 129.437,160.857 129.677,161.097 129.697,161.097 132.24,163.64 132.24,163.66 132.25,163.67 135.384,163.67 135.504,163.79 135.52,163.79 135.715,163.985 137.855,163.985 139.485,162.354 139.485,162.224 ; v1@137.05,156.9 v1@137.1,156.9 ; v1(137.2,156.9) v1@137.1,156.9 ; v1@137.373,156.726 cw(c138.021,156.078) 138.021,156.995 ; v1@137.373,157.073 ccw(c137.561,157.261) 137.561,156.995 ; 139.485,160.876 139.485,162.224 ; 139.485,160.876 139.485,158.438 138.042,156.995 137.195,156.995 v1@137.1,156.9
DSS_DATA11: P19.18 RR11.5 | length 35
  Top Layer w0.21: RR11.5@115.389,154.351 cw(c115.227,154.189) 115.456,154.189 cw(c115.685,154.189) RR11.5@115.523,154.351 ; 115.456,153.237 ccw(c116.037,153.237) v1@115.626,152.826 ; 115.456,153.744 ccw(c116.544,153.744) v1@115.775,152.975 ; RR11.5@115.456,154.251 ccw(c117.051,154.251) v1@115.923,153.123 ; RR11.5@115.456,154.718 115.456,153.244 ; v1@115.515,153.018 ccw(c115.293,153.081) 115.456,153.244 ; v1@115.682,153.185 cw(c115.619,153.407) 115.456,153.244 ; v1(115.75,152.95) 115.456,153.244 ; P19.18@134.8,156.9 v1(136.25,156.9) ; P19.18@135.653,156.797 cw(c135.9,156.55) 135.9,156.9 cw(c135.9,157.25) P19.18@135.653,157.003 ; v1@136.019,156.819 ccw(c135.907,156.779) 135.877,156.894 ccw(c135.81,157.142) v1@136.035,157.018 ; v1@136.019,156.981 cw(c135.907,157.021) 135.877,156.906 cw(c135.81,156.658) v1@136.035,156.782 ; v1@136.077,156.727 ccw(c135.659,156.309) 135.659,156.9 ccw(c135.659,157.491) v1@136.077,157.073
  Bottom Layer w0.21: v1@115.75,152.705 cw(c115.75,151.631) 116.51,152.39 ; v1@115.75,152.915 cw(c115.75,152.348) 116.151,152.749 ; v1(115.75,152.95) 115.95,152.95 116.75,152.15 ; 116.754,152.154 116.759,152.15 118.593,152.15 119.029,151.715 120.722,151.715 121.327,151.11 124.87,151.11 124.88,151.1 126.394,151.1 126.509,151.215 126.599,151.215 128.834,153.45 128.849,153.45 128.883,153.484 129.809,153.484 131.394,155.069 131.394,155.214 133.08,156.9 v1(136.25,156.9) ; v1@136.077,156.727 ccw(c135.659,156.309) 135.659,156.9 ccw(c135.659,157.491) v1@136.077,157.073
DSS_DATA12: P19.19 RR12.8 | length 47.5
  Top Layer w0.21: v1@112.902,154.023 ccw(c112.286,154.639) RR12.8@113.157,154.639 ; v1@112.992,154.08 ccw(c112.888,154.368) 113.184,154.289 ccw(c113.46,154.215) v1@113.253,154.018 ; v1(113.075,153.85) 113.075,153.689 113.157,153.607 RR12.8@113.157,154.718 ; RR12.8@113.09,154.351 cw(c112.928,154.189) 113.157,154.189 cw(c113.386,154.189) RR12.8@113.224,154.351 ; RR12.8@113.157,154.243 ccw(c113.469,154.243) v1@113.248,154.023 ; v1(137.8,156.1) P19.19@139.2,156.1 ; v1@137.973,155.927 cw(c138.391,155.509) 138.391,156.1 cw(c138.391,156.691) v1@137.973,156.273 ; P19.19@138.347,155.997 ccw(c138.1,155.75) 138.1,156.1 ccw(c138.1,156.45) P19.19@138.347,156.203
  Bottom Layer w0.21: v1(113.075,153.85) 113.075,153.847 113.2,153.722 113.572,153.722 ; v1@113.31,153.919 ccw(c113.572,153.995) 113.572,153.722 ; v1@137.8,156.135 ccw(c137.8,156.582) 138.116,156.266 ; v1@137.8,156.345 ccw(c137.8,157.299) 138.474,156.624 ; v1@137.95,156.1 139.895,158.045 139.895,161.046 ; v1@138.045,156.1 cw(c138.274,156.1) 138.112,156.262 ; 139.895,161.046 139.895,162.054 ; 139.895,162.054 139.895,162.524 138.025,164.395 135.528,164.395 135.214,164.08 132.08,164.08 129.267,161.267 129.19,161.267 127.568,159.645 127.345,159.645 127.115,159.415 125.217,159.415 124.5,158.697 124.5,157.924 122.461,155.885 119.885,155.885 118.69,154.69 114.54,154.69 113.9,154.05 113.572,153.722
DSS_DATA13: P19.20 RR12.7 | length 32
  Top Layer w0.21: RR12.7@112.29,154.351 cw(c112.024,154.085) 112.4,154.085 ; RR12.7@112.39,154.685 112.45,154.745 RR12.7@112.45,154.3 ; RR12.7@112.4,154.3 112.4,153.876 112.405,153.871 112.405,153.571 ; v1@112.705,152.809 ccw(c111.679,152.845) 112.405,153.571 ; 112.746,153.229 cw(c112.339,152.821) v1@112.915,152.801 ; v1(112.95,152.8) 112.95,153.026 112.405,153.571 ; v1(133.4,156.1) P19.20@134.8,156.1 ; v1@133.573,155.927 cw(c133.991,155.509) 133.991,156.1 cw(c133.991,156.691) v1@133.573,156.273 ; P19.20@133.947,155.997 ccw(c133.7,155.75) 133.7,156.1 ccw(c133.7,156.45) P19.20@133.947,156.203
  Bottom Layer w0.21: v1@112.95,152.555 cw(c112.95,151.964) 113.368,152.382 cw(c113.786,152.8) v1@113.195,152.8 ; v1(112.95,152.8) 114.01,151.74 118.423,151.74 118.859,151.305 120.552,151.305 121.157,150.7 124.7,150.7 ; 124.7,150.69 126.564,150.69 126.679,150.805 ; 126.769,150.805 129.004,153.04 129.019,153.04 129.053,153.074 129.979,153.074 131.804,154.899 131.804,155.044 132.86,156.1 ; v1@133.216,155.939 ccw(c132.86,155.627) 132.86,156.1 ; v1@133.216,156.261 cw(c132.86,156.573) 132.86,156.1 ; v1(133.4,156.1) 132.86,156.1
DSS_DATA14: P19.21 RR12.6 | length 43.2
  Top Layer w0.21: RR12.6@111.49,154.351 cw(c111.328,154.189) 111.557,154.189 cw(c111.786,154.189) RR12.6@111.624,154.351 ; 111.557,153.484 ccw(c112.134,153.484) v1@111.726,153.076 ; 111.557,153.991 ccw(c112.641,153.991) v1@111.875,153.224 ; RR12.6@111.557,154.498 ccw(c113.148,154.498) v1@112.023,153.373 ; RR12.6@111.557,154.718 111.557,153.343 111.743,153.343 111.75,153.336 111.75,153.3 v1(111.85,153.2) ; v1@137.2,155.3 P19.21@139.2,155.3 ; v1@137.373,155.076 cw(c137.913,154.537) 137.913,155.3 ; v1@137.373,155.423 ccw(c137.67,155.72) 137.67,155.3 ; P19.21@138.347,155.197 ccw(c138.1,154.95) 138.1,155.3 ccw(c138.1,155.65) P19.21@138.347,155.403
  Bottom Layer w0.21: v1@111.643,153.057 111.723,153.057 112.765,152.015 ; v1@111.75,153.35 111.743,153.343 111.75,153.336 111.75,153.3 v1(111.85,153.2) ; v1@111.885,153.2 ccw(c112.62,153.2) 112.1,152.68 ; v1@112.095,153.2 ccw(c113.337,153.2) 112.459,152.321 ; 112.75,152 113.42,151.33 118.254,151.33 118.689,150.895 120.382,150.895 121.092,150.185 125.961,150.185 126.801,149.345 127.192,149.345 ; 127.217,149.37 127.309,149.37 127.795,149.855 127.795,150.671 129.344,152.22 129.359,152.22 129.393,152.254 130.319,152.254 130.84,152.775 131.425,152.775 132.565,153.915 133.038,153.915 ; 133.058,153.895 135.395,153.895 136.75,155.25 ; 136.013,154.513 cw(c137.2,153.327) v1@137.2,155.005 ; 136.372,154.872 cw(c137.2,154.044) v1@137.2,155.215 ; 136.73,155.23 cw(c137.2,154.761) v1@137.2,155.425 ; v1@136.994,155.117 ccw(c136.75,154.959) 136.75,155.25 ; v1@136.994,155.383 cw(c136.75,155.54) 136.75,155.25 ; v1(137.2,155.25) 136.75,155.25
DSS_DATA15: P19.22 RR12.5 | length 45.7
  Top Layer w0.21: v1@109.15,152.8 v1(109.15,152.75) 109.39,152.99 109.48,152.99 109.53,152.94 109.87,152.94 ; v1@109.181,152.734 cw(c109.522,152.554) 109.522,152.94 ; v1@109.367,152.636 cw(c109.87,152.372) 109.87,152.94 ; RR12.5@110.69,154.351 cw(c110.545,154.206) 110.75,154.206 ; 110.75,154.172 cw(c111.003,154.172) RR12.5@110.824,154.351 ; RR12.5@110.75,154.75 110.75,153.2 110.54,152.99 109.92,152.99 109.87,152.94 ; v1(125.1,147.8) 126.95,149.65 ; v1@125.1,148.045 ccw(c125.1,148.636) 125.518,148.218 ccw(c125.936,147.8) v1@125.345,147.8 ; v1@126.8,149.956 cw(c126.562,149.65) 126.95,149.65 ; v1(126.95,150.15) 126.95,149.65 ; v1@127.1,149.956 ccw(c127.338,149.65) 126.95,149.65 ; P19.22@134.8,155.3 135.95,155.3 v1(136.6,155.95) ; P19.22@135.653,155.197 cw(c135.9,154.95) 135.9,155.3 cw(c135.9,155.65) P19.22@135.653,155.403 ; v1@136.355,155.95 cw(c135.764,155.95) 136.182,155.532 cw(c136.6,155.114) v1@136.6,155.705
  Bottom Layer w0.21: v1@109.15,152.6 109.65,152.1 ; 109.652,152.102 111.053,150.701 ; 111.1,150.631 112.481,149.25 117.285,149.25 117.69,148.845 119.533,148.845 120.243,148.135 124.033,148.135 124.584,147.585 ; 124.819,147.585 ccw(c124.819,147.832) v1@125.065,147.804 ; v1@124.857,147.828 cw(c124.584,147.859) 124.584,147.585 ; v1@124.885,147.585 124.584,147.585 ; v1(126.95,150.15) 127.385,150.585 127.385,150.841 129.174,152.63 129.189,152.63 129.223,152.664 130.149,152.664 130.67,153.185 131.135,153.185 131.95,154 ; v1@126.95,150.395 ccw(c126.95,150.986) 127.368,150.568 ccw(c127.786,150.15) v1@127.195,150.15 ; 131.9,154 132.4,154.5 132.6,154.7 135.35,154.7 v1(136.6,155.95) ; v1@136.355,155.95 cw(c135.764,155.95) 136.182,155.532 cw(c136.6,155.114) v1@136.6,155.705
DSS_DATA16: P19.23 RR13.8 | length 50.3
  Top Layer w0.21: 136.795,150.178 136.795,150.718 137.855,151.778 137.855,154.036 138.319,154.5 P19.23@139.2,154.5 ; 136.81,150.163 136.81,149.69 137.2,149.3 v1@137.45,149.05 ; 137.2,149.3 ccw(c137.388,149.488) v1@137.524,149.26
  Bottom Layer w0.21: RR13.8@110.931,158.796 cw(c110.764,158.629) 111,158.629 ; RR13.8@110.998,159.163 111,159.161 111,155.1 109.978,154.078 109.978,154.068 109.9,153.99 109.9,152.434 111.463,150.871 111.463,150.848 112.621,149.69 117.574,149.69 118.01,149.255 119.703,149.255 120.413,148.545 125.281,148.545 126.176,147.65 ; 111,158.638 cw(c111.223,158.638) RR13.8@111.065,158.796 ; 126.188,147.638 126.2,147.65 126.839,147.65 129.894,144.595 131.125,144.595 132.345,145.815 132.345,145.821 132.545,146.021 132.545,149.471 132.928,149.855 133.471,149.855 ; 133.501,149.825 135.569,149.825 ; 135.574,149.83 135.834,149.83 136.064,149.6 136.793,149.6 v1@137.344,149.05
  other v1: 137.65,149.05
DSS_DATA17: P19.24 RR13.7 | length 44.5
  Top Layer w0.21: v1@130.077,145.423 ccw(c129.296,146.204) 130.4,146.204 ; v1@130.225,145.275 ccw(c129.803,145.697) 130.4,145.697 ; 130.395,146.35 130.395,146.471 131.029,147.105 ; v1@130.4,145.4 130.4,146.35 ; 131.055,147.105 132.001,148.051 132.001,149.601 133.05,150.65 133.05,153.7 133.85,154.5 P19.24@134.8,154.5 ; 133.461,154.111 cw(c134.05,153.522) P19.24@134.05,154.355
  Bottom Layer w0.21: 111.741,155.611 111.741,159.106 RR13.7@111.798,159.163 ; 111.741,158.496 cw(c112.165,158.496) RR13.7@111.865,158.796 ; 111.75,155.602 111.75,155.26 110.31,153.82 110.31,152.604 112.814,150.1 117.744,150.1 118.179,149.665 119.873,149.665 120.583,148.955 125.451,148.955 126.346,148.06 127.009,148.06 129.819,145.25 ; v1@130.039,145.125 ccw(c129.819,144.994) 129.819,145.25 ; v1@130.039,145.375 cw(c129.819,145.506) 129.819,145.25 ; v1(130.25,145.25) 129.819,145.25
DSS_DATA18: P19.25 RR13.6 | length 52.8
  Top Layer w0.21: P19.25@139.2,153.7 140.9,153.7 v1(140.95,153.75) ; P19.25@140.053,153.597 cw(c140.3,153.35) 140.3,153.7 cw(c140.3,154.05) P19.25@140.053,153.803 ; 140.238,153.7 ccw(c140.238,154.462) v1@140.777,153.923 ; 140.479,153.7 cw(c140.479,153.279) v1@140.777,153.577
  Bottom Layer w0.21: 112.197,151.297 110.72,152.773 110.72,153.65 112.6,155.53 112.6,155.886 112.598,155.888 RR13.6@112.598,159.163 ; 112.2,151.3 112.99,150.51 117.914,150.51 118.349,150.075 120.043,150.075 120.752,149.365 125.621,149.365 126.461,148.525 127,148.525 ; RR13.6@112.531,158.796 cw(c112.369,158.634) 112.598,158.634 cw(c112.827,158.634) RR13.6@112.665,158.796 ; 127,148.5 127.18,148.5 128.16,147.52 128.16,147.489 129.649,146 130.824,146 131.029,145.795 131.745,145.795 131.935,145.985 131.935,145.991 132.135,146.191 132.135,149.641 132.759,150.265 135.979,150.265 136.009,150.235 136.015,150.235 136.15,150.1 136.8,150.1 ; 136.8,150.11 136.863,150.11 137.228,149.745 139.972,149.745 140.822,150.595 140.871,150.595 141.255,150.978 141.255,151.027 141.45,151.223 141.45,151.75 ; v1@140.95,153.505 cw(c140.95,152.914) 141.368,153.332 cw(c141.786,153.75) v1@141.195,153.75 ; v1(140.95,153.75) 141.455,153.245 141.455,151.75
DSS_DATA19: P19.26 RR13.5 | length 41.2
  Top Layer w0.21: v1(131.3,146.45) 132.45,147.6 132.45,149.4 133.46,150.41 133.46,153.53 133.63,153.7 P19.26@134.8,153.7 ; v1@131.3,146.695 ccw(c131.3,147.286) 131.718,146.868 ccw(c132.136,146.45) v1@131.545,146.45 ; P19.26@133.947,153.597 ccw(c133.7,153.35) 133.7,153.7 ccw(c133.7,154.05) P19.26@133.947,153.803
  Bottom Layer w0.21: RR13.5@113.331,158.796 cw(c113.169,158.634) 113.398,158.634 cw(c113.627,158.634) RR13.5@113.465,158.796 ; RR13.5@113.398,159.163 113.398,156.109 113.4,156.107 113.4,155.75 111.13,153.48 111.13,152.943 111.732,152.341 111.779,152.341 113.2,150.92 118.084,150.92 118.519,150.485 120.213,150.485 120.922,149.775 125.791,149.775 126.631,148.935 127.365,148.935 129.85,146.45 v1(131.3,146.45)
DSS_DATA20: P19.27 RR14.8 | length 60
  Top Layer w0.21: P19.27@139.1,152.9 141.026,152.9 141.605,153.479 141.605,156.595 v1(141.1,157.1) ; P19.27@140.053,152.797 cw(c140.3,152.55) 140.3,152.9 cw(c140.3,153.25) P19.27@140.053,153.003 ; v1@141.1,156.855 cw(c141.1,156.264) 141.518,156.682 cw(c141.936,157.1) v1@141.345,157.1
  Bottom Layer w0.21: RR14.8@110.05,168.05 RR14.8@110.05,168.4 ; RR14.8@110.109,168.18 110.109,167.761 110.816,167.055 111.071,167.055 111.494,166.632 111.766,166.632 111.843,166.555 113.175,166.555 113.465,166.845 113.495,166.845 113.834,167.184 113.834,168.634 114.244,169.044 114.244,169.094 116.515,171.365 116.677,171.365 117.195,171.883 117.195,171.968 117.432,172.205 117.517,172.205 117.545,172.233 117.545,172.468 119.949,174.872 126.716,174.872 127.023,174.565 129.445,174.565 129.72,174.29 133.11,174.29 133.9,173.5 133.9,168.7 135.2,167.4 136.397,167.4 137.705,166.092 137.708,166.092 141.605,162.195 141.605,158.205 141.15,157.75 ; RR14.8@110.204,167.88 ccw(c110.72,167.88) 110.355,167.515 ; v1@140.939,157.284 ccw(c140.531,157.75) 141.15,157.75 ; v1(141.1,157.1) 141.1,157.15 141.15,157.2 141.15,157.75 ; 141.15,157.571 ccw(c141.571,157.571) v1@141.273,157.273